# Altium PCB PCB1.PcbDoc (part 2 of 2)
Units mm, origin at the board's own origin, x right, y up, seen from the top; angles counter-clockwise.
Board outline 138.94 x 170 mm, 2 copper layers (Top Layer, Bottom Layer); 258 components, 165 nets, 778 pads, 42 vias.
Unrouted connection lines stored in the file: 312.
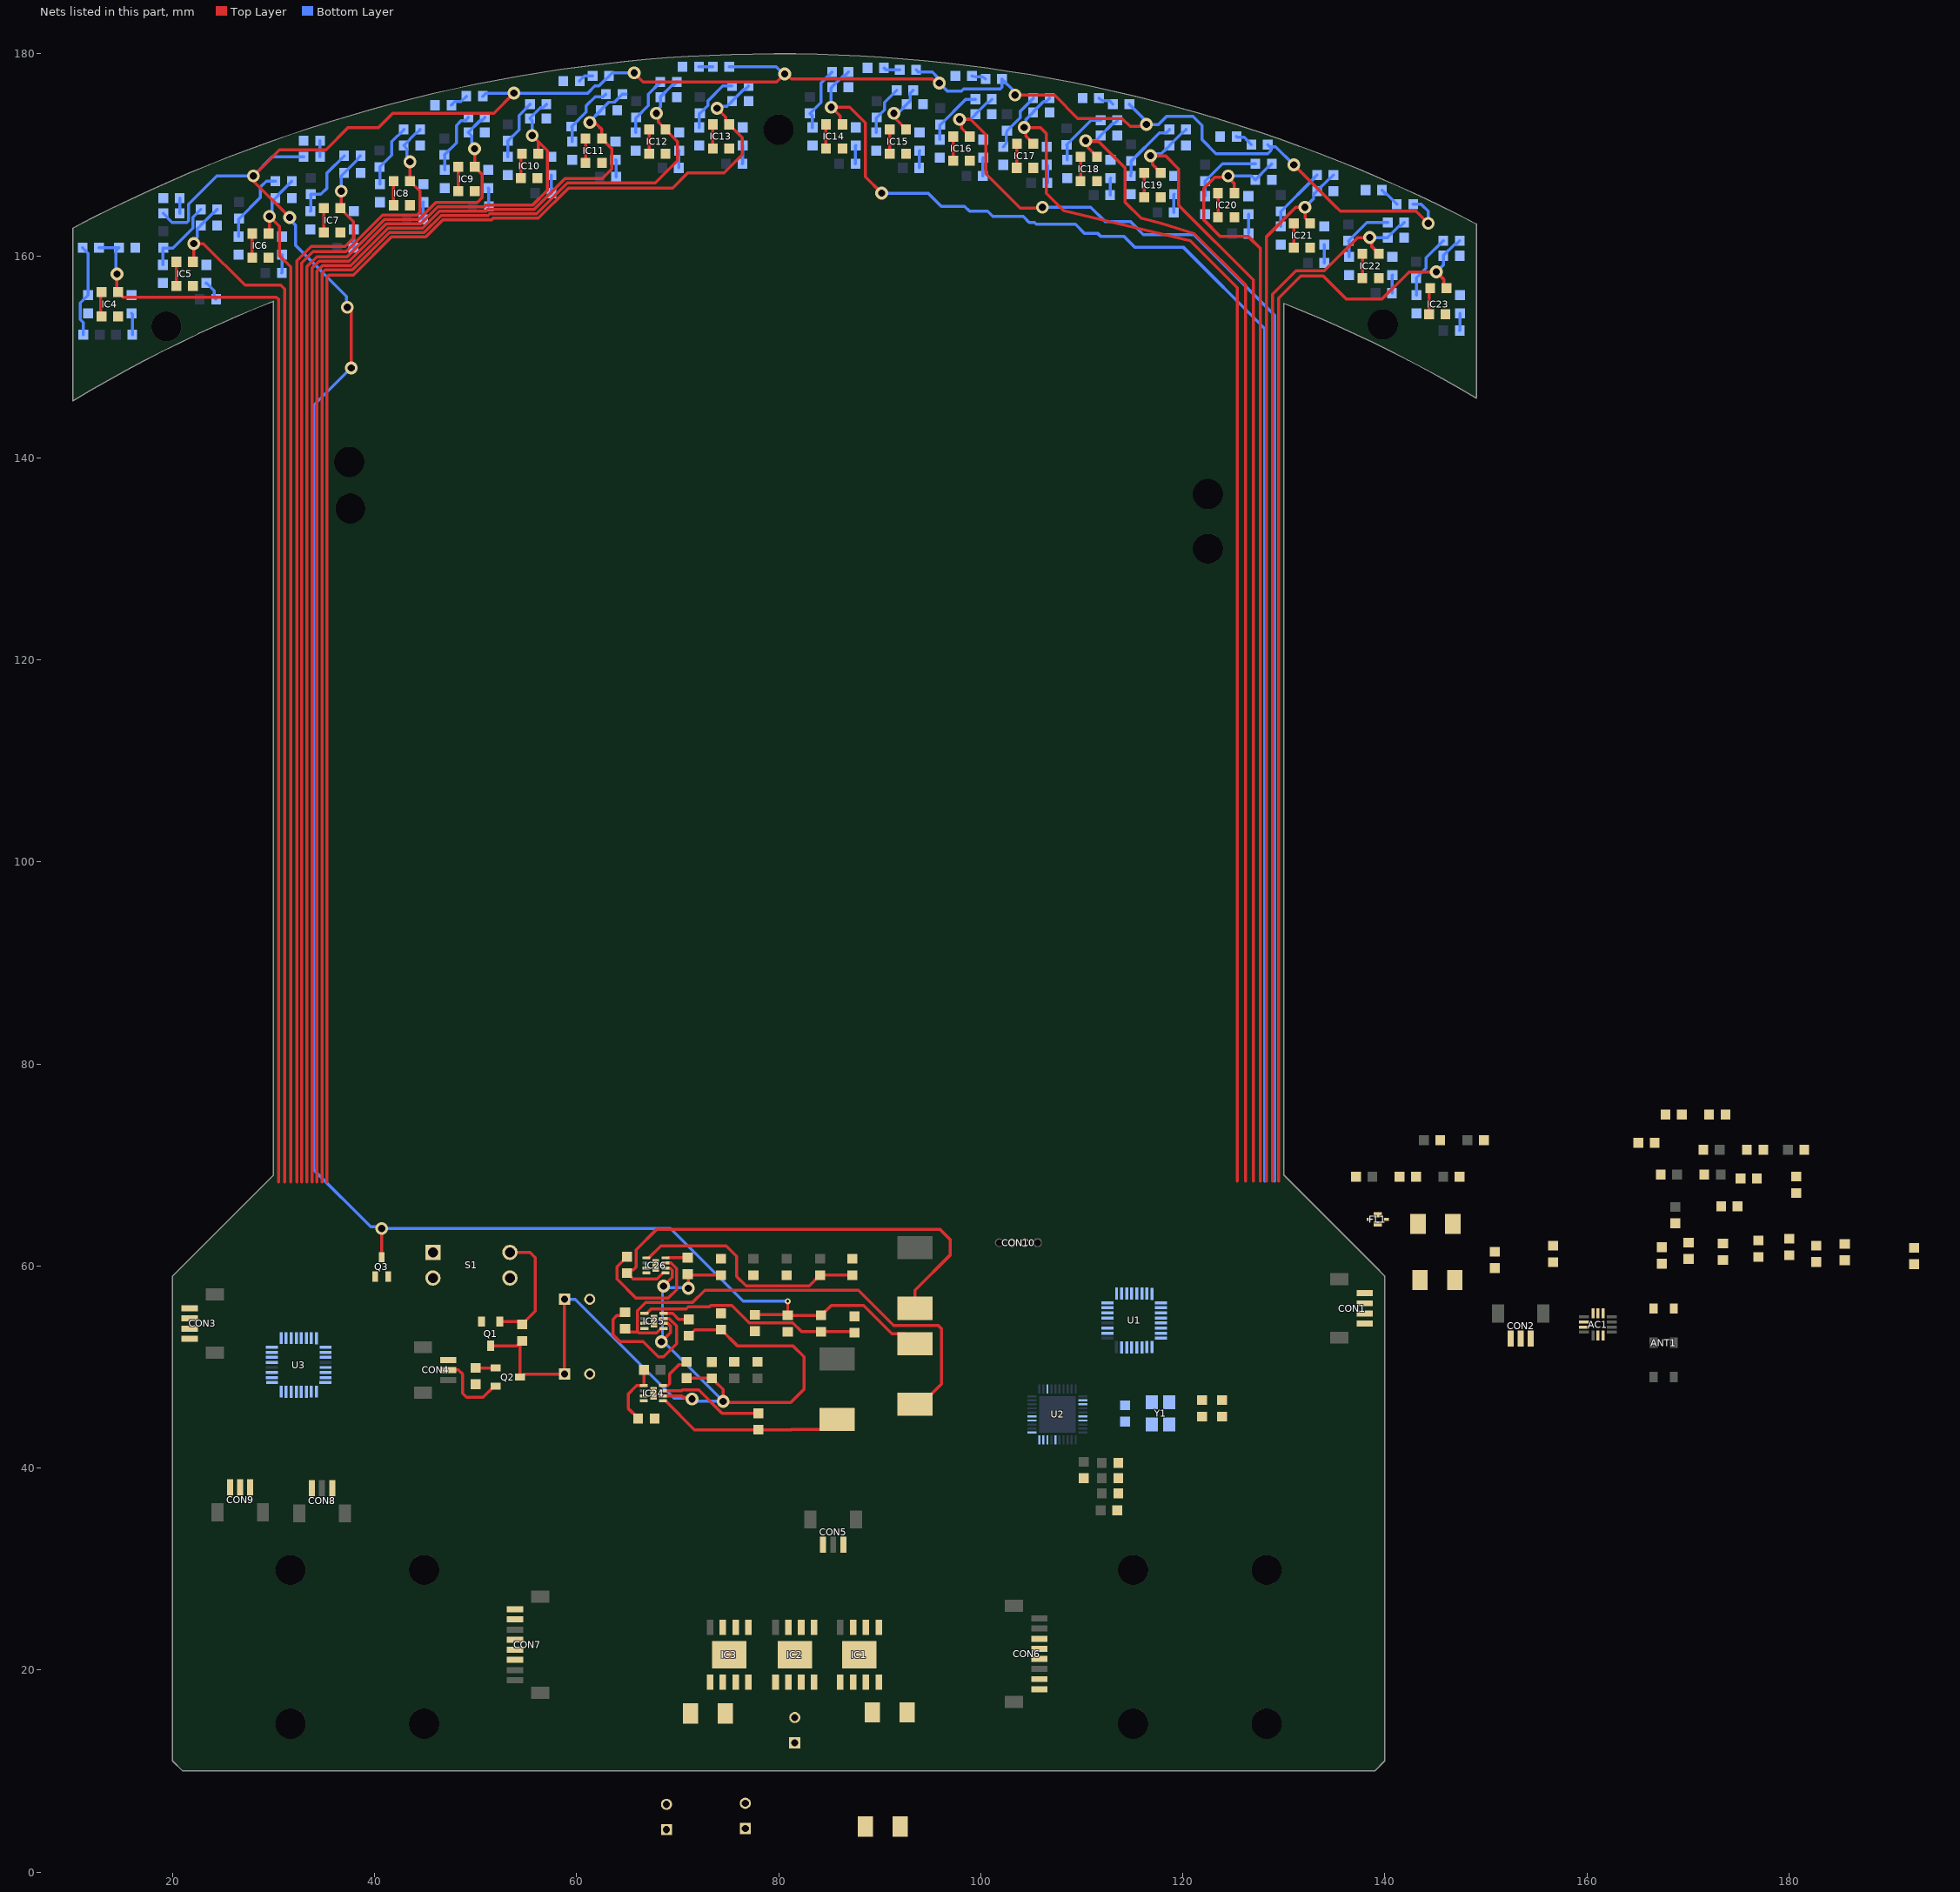
[diagram p2: the nets of this part, all layers, seen from the top]

## Via types
v1: diameter 1.27, hole 0.711, Top Layer to Bottom Layer, tented both sides, 41 vias
v2: diameter 0.6, hole 0.3, Top Layer to Bottom Layer, tented both sides, 1 vias

## Nets (pads, with @x,y where several pads share a name; then routed paths per layer and width w, separated by ;. In a path a pad name is that pad's centre, name@x,y a point inside that pad or via, vN(x,y) a via of type N, cw(c..) or ccw(c..) an arc to the next point about the centre after c; other vN are vias at no path point) (continued)
5V: C15.2 C16.2 CON9.2 L4.2 Q3.3 R14.1 R84.1 R87.1 R90.1 R93.1 R98.1 R101.1 R104.1 R107.1 R110.1 R111.1 | length 344.2
  Top Layer w0.3: v1(31.6,163.8) 28,167.4 v1(28,167.9) 30.6,170.5 35.2,170.5 37.4,172.7 40.4,172.7 41.8,174.1 51.8,174.1 v1(53.8,176.1) ; v1(37.3,154.9) 37.7,154.5 v1(37.7,148.9) ; Q3.3@40.7,60.85 v1(40.7,63.7) ; v1(65.7,178.1) 66.6,177.2 79.8,177.2 v1(80.6,178) 80.761,178 81.261,177.5 95.239,177.5 95.639,177.1 v1(95.9,177.1) ; C15.2@77.637,55.165 C16.2@80.848,55.165 ; v2(80.9,56.5) C16.2@80.9,55.113 84.217,55.113 85.205,56.1 88.4,56.1 91.2,53.3 92.5,53.3 L4.2@93.5,52.3 ; v1(103.4,175.9) 107.3,175.9 109.6,173.6 114,173.6 114.8,172.8 116.2,172.8 v1(116.4,173) ; v1(131,169) 135,165 135.6,164.4 140,164.4 143.1,164.4 v1(144.3,163.2)
  Bottom Layer w0.3: R104.1@19.087,164.183 19.97,163.3 21.424,163.3 21.6,163.476 21.6,165.1 24.4,167.9 v1(28,167.9) 29.883,169.783 32.987,169.783 R101.1@32.987,169.8 ; v1(31.6,163.8) 31.6,163.6 32.2,163 32.2,161 37.215,155.985 37.215,154.985 v1(37.3,154.9) ; v1(37.7,148.9) 34,145.2 34,69.9 34,69.5 39.615,63.885 40.515,63.885 v1(40.7,63.7) 69.3,63.7 76.5,56.5 v2(80.9,56.5) ; R98.1@50.713,175.783 51.03,176.1 v1(53.8,176.1) 61.1,176.1 61.8,176.8 62.213,176.8 62.863,177.45 62.88,177.45 63.213,177.783 R107.1@63.213,177.8 63.513,178.1 v1(65.7,178.1) ; R93.1@75.113,178.7 79.766,178.7 80.466,178 v1(80.6,178) ; R111.1@93.613,178.4 93.813,178.2 95.2,178.2 v1@95.714,177.686 ; v1(95.9,177.1) 96.7,176.3 98.1,176.3 98.3,176.5 101.937,176.5 102.113,176.676 R110.1@102.113,177.483 ; R110.1@102.113,177.5 R110.1@102.113,177.483 ; v1@103.3,176.295 R110.1@102.113,177.483 ; R90.1@114.713,175 114.713,174.983 v1@116.214,173.481 ; v1(116.4,173) 117.6,173 118.4,173.8 121,173.8 121.9,172.9 121.9,171.5 123.3,170.1 128.4,170.1 128.7,170.4 128.7,170.713 R87.1@128.61,170.803 ; R87.1@128.413,171 R87.1@128.61,170.803 ; v1(131,169) 129.197,170.803 R87.1@128.61,170.803 ; R84.1@142.813,165.1 142.813,165.083 143.617,165.083 144.3,164.4 v1(144.3,163.2)
11.1V: C10.2 C14.2 C18.2 C21.1 C21.2 C22.1 C22.2 C23.1 C23.2 C50.1 C50.2 C51.1 C51.2 C52.1 C52.2 C53.1 C54.1 IC1.5 IC2.5 IC3.5 IC24.2 IC25.2 IC26.2 Q1.3 Q2.3 R1.2 R8.2 R11.2 R12.2 R16.2 | length 97.3
  Top Layer w0.3: Q1.3@51.5,52.1 54.095,52.1 54.583,52.587 R11.2@54.6,52.587 54.4,52.387 Q2.3@54.4,49 54.55,49 54.85,49.3 C53.1@58.8,49.3 C54.1@58.8,56.7 ; v1(68.4,52.5) 69.277,53.377 69.277,54.065 69.042,54.3 IC25.2@68.6,54.3 ; IC24.2@68.55,47.15 70.388,47.15 70.532,47.005 71.234,47.005 v1(71.42,46.82) ; v1(68.6,58) 69.477,58.877 69.477,59.565 69.242,59.8 IC26.2@68.8,59.8 ; R8.2@70.9,48.887 73.374,48.887 C10.2@73.4,48.862 73.417,48.862 73.75,48.529 73.75,48.512 74.5,47.762 v1(74.5,46.6) 74.6,46.5 81.2,46.5 82.5,47.8 82.5,51 81.4,52.1 75.905,52.1 74.317,53.687 C14.2@74.3,53.687 71.717,53.687 71.117,53.087 R12.2@71.1,53.087 ; R16.2@71,59.187 R16.2@71.1,59.087 ; v1(71.052,57.779) 71.052,59.039 R16.2@71.1,59.087 ; C18.2@74.3,59.087 R16.2@71.1,59.087
  Bottom Layer w0.3: C54.1@58.8,56.7 59.854,56.7 69.654,46.9 70.638,46.9 ; v1(68.4,52.5) 68.5,52.6 68.5,57.9 v1(68.6,58) 68.75,57.85 70.981,57.85 v1(71.052,57.779) ; v1@68.6,52.5 v1(74.5,46.6) 71.902,46.6 71.682,46.82 v1(71.42,46.82)
ADC1: C24.1 R32.1 R82.1 U3.7 | length 110
  Top Layer w0.3: R82.1@14.5,156.513 v1(14.5,158.2) ; R82.1@14.513,156.6 14.513,156.583 R82.1@14.654,156.441 ; R82.1@14.613,156.4 14.613,156.383 15.095,155.9 30.3,155.9 30.5,155.7 30.5,68.3
  Bottom Layer w0.3: R32.1@12.726,160.8 C24.1@14.7,160.8 14.4,160.5 v1@14.4,158.4
ADC2: C25.1 R28.1 R85.1 U3.8 | length 105.4
  Top Layer w0.3: R85.1@22.013,159.4 22.1,159.487 v1(22.1,161.2) 23.064,161.2 27.182,157.082 30.728,157.082 31.1,156.71 31.1,68.3
  Bottom Layer w0.3: v1(22.1,161.2) 22.1,161.462 22.455,161.817 22.455,162.667 C25.1@22.7,162.913 ; C25.1@22.787,163 22.787,163.017 24.02,164.25 24.08,164.25 24.413,164.583 R28.1@24.413,164.6
ADC3: C26.1 R29.1 R88.1 U3.9 | length 102.6
  Top Layer w0.3: R88.1@29.513,162.2 29.6,162.287 v1(29.6,163.9) 30.6,162.9 30.6,160 31.7,158.9 31.7,68.3
  Bottom Layer w0.3: v1(29.6,163.9) 29.6,164.162 29.855,164.417 29.855,165.367 C26.1@30.187,165.7 30.52,166.033 30.52,166.09 31.813,167.383 R29.1@31.813,167.4
ADC4: C27.1 R30.1 R91.1 U3.10 | length 107.3
  Top Layer w0.3: 32.3,68.3 32.3,159.5 33.727,160.927 37.104,160.927 37.9,161.723 37.9,163.395 36.613,164.683 R91.1@36.613,164.7 36.7,164.787 v1(36.7,166.4)
  Bottom Layer w0.3: v1(36.7,166.4) 36.7,167.913 C27.1@36.987,168.2 36.987,168.217 38.28,169.51 38.28,169.567 R30.1@38.613,169.9
ADC5: C28.1 R35.1 R94.1 U3.11 | length 114.3
  Top Layer w0.3: 32.8,68.3 32.8,159.3 33.9,160.4 37.181,160.4 40.808,164.027 44.212,164.027 44.5,164.315 44.5,166.395 43.513,167.383 R94.1@43.513,167.4 43.5,167.413 v1(43.5,169.3)
  Bottom Layer w0.3: v1(43.5,169.3) 43.5,169.562 43.22,169.843 43.22,170.567 C28.1@42.887,170.9 42.887,170.917 44.12,172.15 44.18,172.15 44.513,172.483 R35.1@44.513,172.5
ADC6: C29.1 R41.1 R96.1 U3.12 | length 120.1
  Top Layer w0.3: 33.3,68.3 33.3,158.924 34.276,159.9 37.285,159.9 40.985,163.6 44.388,163.6 46.069,165.281 50.168,165.281 50.672,165.785 50.672,168.023 49.913,168.783 R96.1@49.913,168.8 49.9,168.813 v1(49.9,170.6)
  Bottom Layer w0.3: v1(49.9,170.6) 49.9,170.862 49.62,171.143 49.62,171.867 C29.1@49.287,172.2 49.287,172.217 50.42,173.35 50.58,173.35 50.913,173.683 R41.1@50.913,173.7
ADC7: C30.1 R42.1 R99.1 U3.13 | length 128.2
  Top Layer w0.3: 33.8,68.3 33.8,158.773 34.5,159.473 37.461,159.473 41.161,163.173 44.565,163.173 46.246,164.854 50.862,164.854 51.009,165 55.625,165 57.1,166.476 57.1,170.4 56.213,171.287 ; v1(55.6,171.9) 56.213,171.287 ; R99.1@56.213,170.1 56.213,171.287
  Bottom Layer w0.3: v1(55.6,171.9) 55.6,173.387 C30.1@55.387,173.6 55.387,173.617 56.42,174.65 56.68,174.65 57.013,174.983 R42.1@57.013,175
ADC8: C31.1 R43.1 R102.1 U3.14 | length 134.2
  Top Layer w0.3: 34.3,68.3 34.3,158.47 34.876,159.046 37.638,159.046 41.338,162.746 44.742,162.746 46.423,164.427 51.039,164.427 51.185,164.573 55.801,164.573 58.855,167.627 62.527,167.627 63.5,168.6 63.5,170.595 62.513,171.583 R102.1@62.513,171.6 62.513,172.487 61.986,173.014 61.486,173.014 v1(61.3,173.2)
  Bottom Layer w0.3: v1(61.3,173.2) 61.3,173.295 62.387,174.383 C31.1@62.387,174.4 62.387,174.417 63.17,175.2 63.743,175.2 64.526,175.983 R43.1@64.526,176 R43.1@64.913,176
ADC9: C32.1 R44.1 R105.1 U3.15 | length 139.4
  Top Layer w0.3: 34.8,68.3 34.8,158.3 35.1,158.6 37.796,158.6 41.496,162.3 44.9,162.3 46.6,164 51.25,164 51.396,164.146 56.046,164.146 59.1,167.2 67.8,167.2 70,169.4 70,171.295 68.813,172.483 R105.1@68.813,172.5 68.813,172.517 68.086,173.245 68.086,173.914 v1(67.9,174.1)
  Bottom Layer w0.3: v1(67.9,174.1) 67.9,174.362 68.287,174.75 C32.1@68.287,175.7 68.287,175.717 69.42,176.85 69.58,176.85 69.913,177.183 R44.1@69.913,177.2
ADC10: C33.1 R53.1 R108.1 U3.16 | length 145.4
  Top Layer w0.3: 35.3,68.3 35.3,157.924 35.476,158.1 37.9,158.1 41.673,161.873 45.077,161.873 46.777,163.573 51.6,163.573 51.746,163.719 56.223,163.719 59.204,166.7 69.5,166.7 71,168.2 74.6,168.2 76.4,170 76.4,171.695 75.113,172.983 R108.1@75.113,173 74.78,173.333 74.78,173.72 v1(73.9,174.6)
  Bottom Layer w0.3: v1(73.9,174.6) 74.086,174.786 74.873,174.786 75.037,174.95 75.055,174.95 75.387,175.283 C33.1@75.387,175.3 75.387,175.317 76.52,176.45 76.68,176.45 77.013,176.783 R53.1@77.013,176.8
ADC11: C34.1 R54.1 R83.1 U3.17 | length 146
  Top Layer w0.3: R83.1@86.313,173 86.072,173.241 86.072,173.828 v1(85.2,174.7) 87.042,174.7 88.6,173.142 88.6,167.8 v1(90.2,166.2)
  Bottom Layer w0.3: v1(85.2,174.7) 85.2,176.613 C34.1@85.287,176.7 85.287,176.717 86.42,177.85 86.58,177.85 86.913,178.183 R54.1@86.913,178.2 ; v1(90.2,166.2) 94.8,166.2 96.1,164.9 98.4,164.9 98.9,164.4 100.7,164.4 101.2,163.9 104.2,163.9 104.8,163.3 105.346,163.3 105.518,163.129 109.371,163.129 110.3,162.2 111.6,162.2 111.9,161.9 114.2,161.9 115.242,160.858 120.042,160.858 128.1,152.8 128.1,68.4
ADC12: C35.1 R55.1 R86.1 U1.7 | length 4.8
  Top Layer w0.3: v1@91.586,173.545 92.613,172.517 R86.1@92.613,172.5
  Bottom Layer w0.3: v1(91.4,174.1) 91.586,174.286 91.977,174.286 92.674,174.983 C35.1@92.674,175 93.007,175.333 93.007,176.094 R55.1@93.313,176.4
ADC13: C36.1 R56.1 R89.1 U1.8 | length 133.5
  Top Layer w0.3: R89.1@98.913,171.8 98.913,171.817 98.086,172.645 98.086,173.314 v1(97.9,173.5) 99,173.5 100.5,172 100.5,168.124 103.924,164.7 106,164.7 v1(106.1,164.8)
  Bottom Layer w0.3: v1(97.9,173.5) 98.992,173.5 99.474,173.983 C36.1@99.474,174 99.474,174.017 100.607,175.15 100.767,175.15 101.1,175.483 R56.1@101.1,175.5 ; v1(106.1,164.8) 110.9,164.8 112.3,163.4 114.8,163.4 116.1,162.1 121.1,162.1 129.1,154.1 129.1,68.4
ADC14: C37.1 R65.1 R92.1 U1.9 | length 124.8
  Top Layer w0.3: R92.1@105.213,171.1 105.213,171.117 104.486,171.845 104.486,172.514 v1(104.3,172.7) 105.9,172.7 106.5,172.1 106.5,166.194 108.181,164.512 108.242,164.452 120.737,161.493 125.4,156.83 125.4,68.4
  Bottom Layer w0.3: v1(104.3,172.7) 104.486,172.886 104.486,173.481 105.187,174.183 C37.1@105.187,174.2 105.187,174.217 106.22,175.25 106.48,175.25 106.813,175.583 R65.1@106.813,175.6
ADC15: C38.1 R66.1 R95.1 U1.10 | length 117.9
  Top Layer w0.3: v1(110.4,171.4) v1@110.517,171.283 ; R95.1@111.513,169.8 111.513,169.817 110.586,170.745 110.586,171.214 v1@110.517,171.283 ; 126.2,68.4 126.2,157.12 121.181,162.14 121.128,162.192 117.879,163.199 115.875,163.725 114.3,165.3 114.3,168.7 111.717,171.283 v1@110.517,171.283
  Bottom Layer w0.3: v1(110.4,171.4) 111.405,171.4 111.887,171.883 C38.1@111.887,171.9 111.887,171.917 113.02,173.05 113.18,173.05 113.513,173.383 R66.1@113.513,173.4
ADC16: C39.1 R67.1 R97.1 U1.11 | length 113.3
  Top Layer w0.3: R97.1@117.813,168.2 117.813,168.217 116.986,169.045 116.986,169.714 v1(116.8,169.9) 118.3,169.9 119.6,168.6 119.6,165 127,157.6 127,68.4
  Bottom Layer w0.3: v1(116.8,169.9) 116.986,170.086 117.873,170.086 118.337,170.55 118.355,170.55 118.687,170.883 C39.1@118.687,170.9 118.687,170.917 119.92,172.15 119.98,172.15 120.313,172.483 R67.1@120.313,172.5
ADC17: C40.1 R68.1 R100.1 U1.12 | length 112.2
  Top Layer w0.3: R100.1@125.113,166.2 125.113,167.15 124.5,167.763 v1(124.5,167.9) 124.376,167.776 123.176,167.776 122.1,166.7 122.1,163.531 123.731,161.9 126.5,161.9 127.7,160.7 127.7,150.326 127.7,150.265 127.7,68.4
  Bottom Layer w0.3: v1(124.5,167.9) 126.787,167.9 126.837,167.85 126.855,167.85 C40.1@127.187,167.517 ; C40.1@127.187,167.5 C40.1@127.187,167.517 ; R68.1@128.813,169.1 128.813,169.083 128.48,168.75 128.42,168.75 C40.1@127.187,167.517
ADC18: C41.1 R76.1 R103.1 U1.13 | length 104.7
  Top Layer w0.3: 128.3,68.4 128.3,161.9 131.191,164.791 132.091,164.791 v1(132.1,164.8) 132.1,163.726 132.276,163.55 132.28,163.55 132.613,163.217 R103.1@132.613,163.2
  Bottom Layer w0.3: v1(132.1,164.8) 132.955,165.655 132.955,166.067 C41.1@133.287,166.4 133.287,166.417 134.52,167.65 134.58,167.65 134.913,167.983 R76.1@134.913,168
ADC19: C42.1 R77.1 R106.1 U1.14 | length 105.8
  Top Layer w0.3: 128.9,68.4 128.9,156.2 131.2,158.5 134,158.5 137.3,161.8 v1(138.5,161.8) 138.686,161.614 138.686,160.945 139.413,160.217 R106.1@139.413,160.2
  Bottom Layer w0.3: v1(138.5,161.8) C42.1@140.287,161.8 140.287,161.817 141.42,162.95 141.58,162.95 141.913,163.283 R77.1@141.913,163.3
ADC20: C43.1 R78.1 R109.1 U1.15 | length 112.2
  Top Layer w0.3: 129.5,68.4 129.5,155.8 131.7,158 133.9,158 136.2,155.7 139.7,155.7 142.4,158.4 v1(145.1,158.4) 145.867,157.633 145.867,157.046 R109.1@146.113,156.8
  Bottom Layer w0.3: v1(145.1,158.4) 145.787,159.087 C43.1@145.787,160 145.787,160.017 146.92,161.15 147.08,161.15 147.413,161.483 R78.1@147.413,161.5
Anetenna: FL1.3 U2.2
"Enkoder L1": CON6.4 U1.22
"Enkoder L2": CON6.5 U1.23
"Enkoder P1": CON7.4 U1.2
"Enkoder P2": CON7.5 U1.3
GND: AC1.6 AC1.7 ANT1.4 ANT1.5 C1.1 C2.1 C3.1 C4.1 C5.1 C6.1 C7.1 C8.1 C10.1 C11.1 C12.1 C14.1 C15.1 C16.1 C18.1 C19.1 C20.1 C24.2 C25.2 C26.2 C27.2 C28.2 C29.2 C30.2 C31.2 C32.2 C33.2 C34.2 C35.2 C36.2 C37.2 C38.2 C39.2 C40.2 C41.2 C42.2 C43.2 C44.1 C45.1 C46.1 C47.1 C48.1 C49.1 C53.2 C54.2 C55.2 CON1.3 CON3.3 CON4.3 CON6.6 CON7.6 CON8.3 CON9.3 CON10.3 D1.2 D2.2 D3.2 D4.2 D5.2 D6.2 D7.2 D8.2 D9.2 D10.2 D11.2 D12.2 D13.2 D14.2 D15.2 D16.2 D17.2 D18.2 D19.2 D20.2 D21.2 D22.2 D23.2 D24.2 D25.2 D26.2 D27.2 D28.2 D29.2 D30.2 D31.2 D32.2 D33.2 D34.2 D35.2 FL1.2 FL1.4 IC1.1 IC1.9 IC2.1 IC2.9 IC3.1 IC3.9 IC4.2 IC4.4 IC5.2 IC5.4 IC6.2 IC6.4 IC7.2 IC7.4 IC8.2 IC8.4 IC9.2 IC9.4 IC10.2 IC10.4 IC11.2 IC11.4 IC12.2 IC12.4 IC13.2 IC13.4 IC14.2 IC14.4 IC15.2 IC15.4 IC16.2 IC16.4 IC17.2 IC17.4 IC18.2 IC18.4 IC19.2 IC19.4 IC20.2 IC20.4 IC21.2 IC21.4 IC22.2 IC22.4 IC23.2 IC23.4 IC24.7 IC24.8 IC24.9 IC25.7 IC25.8 IC25.9 IC26.7 IC26.8 IC26.9 L1.1 L1.2 L2.1 Q1.2 Q3.2 R2.1 R10.2 R13.1 R15.2 R18.2 R19.1 R20.1 R21.1 S1.A2 S1.B2 U1.5 U2.3 U2.16 U2.20 U2.25 U3.5 Y1.2 Y1.4 | length 0
  Top Layer w0.3: C10.1@73.4,50.487 C10.1@73.413,50.5
HFXT_M: C4.2 U2.7 Y1.3
HFXT_P: R4.2 U2.6
LED1: R112.1 U3.23
LED2: R113.1 U3.2
LED3: R114.1 U3.3
LED4: R115.1 U1.21
LED5: R116.1 U1.20
"LED CONTROL": Q3.1 U1.19
MSCL: AC1.3 R5.2 U3.32
MSDA: AC1.2 R6.2 U3.1
NetAC1_12: AC1.12 CON2.1
NetAC1_13: AC1.13 CON2.3
NetAC1_14: AC1.14 CON2.2
NetC3_2: C3.2 R4.1 Y1.1
NetC9_1: C9.1 IC24.3 | length 10.4
  Top Layer w0.3: IC24.3@68.55,47.65 70.398,47.65 70.48,47.732 72.078,47.732 74.397,45.413 C9.1@78,45.413
NetC9_2: C9.2 IC24.1 L3.1 | length 18.9
  Top Layer w0.3: IC24.1@68.55,46.65 68.8,46.65 71.663,43.787 C9.2@78,43.787 81.269,43.787 81.281,43.8 84.8,43.8 L3.1@85.8,44.8
NetC13_1: C13.1 IC25.3 | length 14.1
  Top Layer w0.3: C13.1@64.8,55.413 64.467,55.08 63.98,55.08 63.6,54.7 63.6,53.176 64.276,52.5 66.6,52.5 68.1,51 68.6,51 69.9,52.3 69.9,54.046 69.146,54.8 IC25.3@68.6,54.8
NetC13_2: C13.2 IC25.1 L4.1 | length 47.6
  Top Layer w0.3: C13.2@64.8,53.787 65.133,53.455 66.061,53.455 66.143,53.373 67.923,53.373 68.35,53.8 IC25.1@68.6,53.8 ; 66.023,53.535 66.023,55.565 66.831,56.373 71.473,56.373 72.7,57.6 87.9,57.6 91.4,54.1 95.8,54.1 96.1,53.8 96.1,48.3 94.1,46.3 L4.1@93.5,46.3
NetC17_1: C17.1 IC26.3 | length 13.1
  Top Layer w0.3: C17.1@65,60.913 64.983,60.913 64,59.93 64,58.7 65.9,56.8 69.054,56.8 69.904,57.65 69.904,59.742 69.346,60.3 IC26.3@68.8,60.3
NetC17_2: C17.2 IC26.1 L5.1 | length 47.7
  Top Layer w0.3: IC26.1@68.8,59.3 68.55,59.3 67.95,58.7 65.605,58.7 65.017,59.287 C17.2@65,59.287 65.333,59.62 65.62,59.62 65.9,59.9 65.9,61.6 67.9,63.6 96,63.6 97,62.6 97,61.1 93.5,57.6 L5.1@93.5,55.8
NetC55_1: C55.1 FL1.1 L2.2
NetCON4_2: CON4.2 Q2.2 | length 7.4
  Top Layer w0.3: CON4.2@47.3,49.7 48.3,49.7 48.7,49.3 48.7,47.4 49.1,47 50.75,47 51.85,48.1 Q2.2@52,48.1
NetCON5_1: CON5.1 IC2.8
NetCON5_3: CON5.3 IC2.6
NetCON6_1: CON6.1 IC1.8
NetCON6_2: CON6.2 IC1.6
NetCON7_1: CON7.1 IC3.8
NetCON7_2: CON7.2 IC3.6
NetD1_1: D1.1 R82.2 | length 2.2
  Top Layer w0.3: D1.1@12.774,154.4 12.887,154.513 R82.2@12.887,156.6
NetD2_1: D2.1 R83.2 | length 2.4
  Top Layer w0.3: D2.1@84.687,170.6 R83.2@84.687,173
NetD3_1: D3.1 R84.2 | length 2.1
  Bottom Layer w0.3: D3.1@139.726,166.5 139.726,166.483 140.058,166.15 140.155,166.15 141.187,165.117 R84.2@141.187,165.1
NetD4_1: D4.1 R85.2 | length 2.4
  Top Layer w0.3: D4.1@20.387,157 R85.2@20.387,159.4
NetD5_1: D5.1 R86.2 | length 2.4
  Top Layer w0.3: D5.1@90.987,170.1 R86.2@90.987,172.5
NetD6_1: D6.1 R87.2 | length 1.8
  Bottom Layer w0.3: D6.1@125.326,171.8 125.403,171.722 126.082,171.722 126.455,171.35 126.787,171.017 R87.2@126.787,171
NetD7_1: D7.1 R88.2 | length 2.4
  Top Layer w0.3: D7.1@27.887,159.8 R88.2@27.887,162.2
NetD8_1: D8.1 R89.2 | length 2.4
  Top Layer w0.3: D8.1@97.287,169.4 R89.2@97.287,171.8
NetD9_1: D9.1 R90.2 | length 1.6
  Bottom Layer w0.3: D9.1@111.713,175.6 112.045,175.35 112.755,175.35 R90.2@113.087,175
NetD10_1: D10.1 R91.2 | length 2.4
  Top Layer w0.3: D10.1@34.987,162.3 R91.2@34.987,164.7
NetD11_1: D11.1 R92.2 | length 2.4
  Top Layer w0.3: D11.1@103.574,168.7 103.574,171.087 R92.2@103.587,171.1
NetD12_1: D12.1 R93.2 | length 1.4
  Bottom Layer w0.3: D12.1@72.113,178.7 R93.2@73.487,178.7
NetD13_1: D13.1 R94.2 | length 2.4
  Top Layer w0.3: D13.1@41.887,165 R94.2@41.887,167.4
NetD14_1: D14.1 R95.2 | length 2.4
  Top Layer w0.3: D14.1@109.887,167.4 R95.2@109.887,169.8
NetD15_1: D15.1 R96.2 | length 2.4
  Top Layer w0.3: D15.1@48.287,166.4 R96.2@48.287,168.8
NetD16_1: D16.1 R97.2 | length 2.4
  Top Layer w0.3: D16.1@116.187,165.8 R97.2@116.187,168.2
NetD17_1: D17.1 R98.2 | length 1.9
  Bottom Layer w0.3: D17.1@47.613,174.9 47.613,174.917 47.945,175.25 48.555,175.25 49.087,175.783 R98.2@49.087,175.8
NetD18_1: D18.1 R99.2 | length 2.4
  Top Layer w0.3: D18.1@54.487,167.7 54.487,170 R99.2@54.587,170.1
NetD19_1: D19.1 R100.2 | length 2.4
  Top Layer w0.3: D19.1@123.487,163.8 R100.2@123.487,166.2
NetD20_1: D20.1 R101.2 | length 1.6
  Bottom Layer w0.3: R101.2@34.613,169.8 D20.1@34.613,171.4
NetD21_1: D21.1 R102.2 | length 2.4
  Top Layer w0.3: D21.1@60.887,169.2 R102.2@60.887,171.6
NetD22_1: D22.1 R103.2 | length 2.4
  Top Layer w0.3: D22.1@130.987,160.8 R103.2@130.987,163.2
NetD23_1: D23.1 R104.2 | length 1.5
  Bottom Layer w0.3: R104.2@20.713,164.2 D23.1@20.713,165.7
NetD24_1: D24.1 R105.2 | length 2.4
  Top Layer w0.3: D24.1@67.187,170.1 R105.2@67.187,172.5
NetD25_1: D25.1 R106.2 | length 2.4
  Top Layer w0.3: D25.1@137.787,157.8 R106.2@137.787,160.2
NetD26_1: D26.1 R107.2 | length 1.5
  Bottom Layer w0.3: D26.1@60.313,177.3 60.313,177.317 60.795,177.8 R107.2@61.587,177.8
NetD27_1: D27.1 R108.2 | length 2.4
  Top Layer w0.3: D27.1@73.487,170.6 R108.2@73.487,173
NetD28_1: D28.1 R109.2 | length 2.6
  Top Layer w0.3: D28.1@144.387,154.2 144.387,156.7 R109.2@144.487,156.8
NetD29_1: D29.1 R110.2 | length 1.4
  Bottom Layer w0.3: D29.1@99.126,177.8 99.458,177.727 100.155,177.727 R110.2@100.487,177.5
NetD30_1: D30.1 R111.2 | length 1.6
  Bottom Layer w0.3: D30.1@90.426,178.6 90.626,178.4 R111.2@91.987,178.4
NetD31_1: D31.1 R112.2
NetD32_1: D32.1 R113.2
NetD33_1: D33.1 R114.2
NetD34_1: D34.1 R115.2
NetD35_1: D35.1 R116.2
NetIC1_7: IC1.7 R19.2
NetIC2_7: IC2.7 R20.2
NetIC3_7: IC3.7 R21.2
NetIC4_1: IC4.1 R27.2 | length 2.1
  Bottom Layer w0.3: IC4.1@15.95,154.3 16.026,154.224 R27.2@16.026,152.2
NetIC4_3: IC4.3 R22.2 R32.2 | length 9.3
  Bottom Layer w0.3: R32.2@11.1,160.8 11.1,160.783 11.65,160.233 IC4.3@11.65,156.1 10.873,155.323 10.873,153.685 11.174,153.384 R22.2@11.174,152.2
NetIC5_1: IC5.1 R31.2 | length 2.1
  Bottom Layer w0.3: IC5.1@23.313,157.263 IC5.1@23.35,157.3 24.124,156.526 24.124,155.889 R31.2@24.313,155.7
NetIC5_3: IC5.3 R23.2 R28.2 | length 7.6
  Bottom Layer w0.3: IC5.3@19.05,159.1 19.05,160.75 20.05,160.75 22.028,162.728 22.028,163.823 22.787,164.583 R28.2@22.787,164.6
NetIC6_1: IC6.1 R33.2 | length 1.8
  Bottom Layer w0.3: R33.2@30.813,158.3 30.85,158.337 IC6.1@30.85,160.1
NetIC6_3: IC6.3 R24.2 R29.2 | length 7.5
  Bottom Layer w0.3: IC6.3@26.55,161.9 26.55,163.637 R24.2@26.6,163.687 26.617,163.687 28.7,165.77 28.7,166.8 29.3,167.4 R29.2@30.187,167.4
NetIC7_1: IC7.1 R34.2 | length 1.8
  Bottom Layer w0.3: R34.2@37.913,160.8 37.95,160.837 IC7.1@37.95,162.6
NetIC7_3: IC7.3 R25.2 R30.2 | length 7.5
  Bottom Layer w0.3: IC7.3@33.65,164.4 33.7,164.45 R25.2@33.7,166.087 34.687,166.087 35.3,166.7 35.3,168.195 36.987,169.883 R30.2@36.987,169.9
NetIC8_1: IC8.1 R36.2 | length 1.7
  Bottom Layer w0.3: R36.2@44.813,163.6 44.813,165.263 IC8.1@44.85,165.3
NetIC8_3: IC8.3 R26.2 R35.2 | length 6.4
  Bottom Layer w0.3: IC8.3@40.55,167.1 40.55,168.82 41.702,169.972 41.702,171.298 42.887,172.483 R35.2@42.887,172.5
NetIC9_1: IC9.1 R45.2 | length 1.8
  Bottom Layer w0.3: IC9.1@51.25,166.7 51.313,166.637 R45.2@51.313,164.9
NetIC9_3: IC9.3 R37.2 R41.2 | length 6.5
  Bottom Layer w0.3: IC9.3@46.95,168.5 46.95,169.937 R37.2@46.9,169.987 46.917,169.987 48.1,171.17 48.1,172.9 48.55,173.35 48.955,173.35 49.287,173.683 R41.2@49.287,173.7
NetIC10_1: IC10.1 R46.2 | length 1.8
  Bottom Layer w0.3: IC10.1@57.5,168 57.513,167.987 R46.2@57.513,166.2
NetIC10_3: IC10.3 R38.2 R42.2 | length 6.1
  Bottom Layer w0.3: IC10.3@53.2,169.8 R38.2@53.2,171.387 53.217,171.387 54.302,172.472 54.302,173.898 55.387,174.983 R42.2@55.387,175
NetIC11_1: IC11.1 R47.2 | length 1.7
  Bottom Layer w0.3: IC11.1@63.85,169.5 63.913,169.437 R47.2@63.913,167.8
NetIC11_3: IC11.3 R39.2 R43.2 | length 6.6
  Bottom Layer w0.3: R39.2@59.5,172.787 59.55,172.737 IC11.3@59.55,171.3 ; R39.2@59.517,172.787 60.952,174.222 60.952,174.852 61.832,175.732 62.632,175.732 R43.2@62.9,176
NetIC12_1: IC12.1 R48.2 | length 1.7
  Bottom Layer w0.3: R48.2@70.113,168.7 70.113,170.363 IC12.1@70.15,170.4
NetIC12_3: IC12.3 R40.2 R44.2 | length 6
  Bottom Layer w0.3: IC12.3@65.85,172.2 65.85,173.637 R40.2@65.9,173.687 65.917,173.687 67.102,174.872 67.102,175.998 68.287,177.183 R44.2@68.287,177.2
NetIC13_1: IC13.1 R57.2 | length 1.8
  Bottom Layer w0.3: R57.2@76.413,169.1 76.45,169.137 IC13.1@76.45,170.9
NetIC13_3: IC13.3 R49.2 R53.2 | length 6
  Bottom Layer w0.3: IC13.3@72.15,172.7 72.15,174.05 R49.2@72.2,174.1 72.217,174.1 72.988,174.871 72.988,175.333 74.455,176.8 R53.2@75.387,176.8
NetIC14_1: IC14.1 R58.2 | length 1.8
  Bottom Layer w0.3: R58.2@87.613,169.1 87.613,170.863 IC14.1@87.65,170.9
NetIC14_3: IC14.3 R50.2 R54.2 | length 6.5
  Bottom Layer w0.3: IC14.3@83.35,172.7 83.35,173.85 R50.2@83.1,174.1 83.117,174.1 84.202,175.185 84.202,177.098 85.287,178.183 R54.2@85.287,178.2
NetIC15_1: IC15.1 R59.2 | length 1.7
  Bottom Layer w0.3: R59.2@93.913,168.7 93.913,170.363 IC15.1@93.95,170.4
NetIC15_3: IC15.3 R51.2 R55.2 | length 5.1
  Bottom Layer w0.3: IC15.3@89.65,172.2 89.65,173.637 R51.2@89.7,173.687 89.717,173.687 90.488,174.458 90.488,175.183 91.687,176.383 R55.2@91.687,176.4
NetIC16_1: IC16.1 R60.2 | length 1.8
  Bottom Layer w0.3: R60.2@100.213,167.9 100.213,169.663 IC16.1@100.25,169.7
NetIC16_3: IC16.3 R52.2 R56.2 | length 6
  Bottom Layer w0.3: IC16.3@95.95,171.5 95.95,172.937 R52.2@96,172.987 96.017,172.987 98.53,175.5 R56.2@99.474,175.5
NetIC17_1: IC17.1 R69.2 | length 1.8
  Bottom Layer w0.3: IC17.1@106.55,169 106.613,168.937 R69.2@106.613,167.2
NetIC17_3: IC17.3 R61.2 R65.2 | length 6
  Bottom Layer w0.3: IC17.3@102.25,170.8 102.527,171.15 102.527,172.055 R61.2@102.6,172.387 102.617,172.387 103.902,173.672 103.902,174.298 105.187,175.583 R65.2@105.187,175.6
NetIC18_1: IC18.1 R70.2 | length 1.7
  Bottom Layer w0.3: R70.2@112.813,166 112.813,167.663 IC18.1@112.85,167.7
NetIC18_3: IC18.3 R62.2 R66.2 | length 5.9
  Bottom Layer w0.3: IC18.3@108.55,169.5 108.55,170.937 R62.2@108.5,170.987 108.517,170.987 110.93,173.4 R66.2@111.887,173.4
NetIC19_1: IC19.1 R71.2 | length 1.8
  Bottom Layer w0.3: R71.2@119.113,164.3 119.113,166.063 IC19.1@119.15,166.1
NetIC19_3: IC19.3 R63.2 R67.2 | length 6.6
  Bottom Layer w0.3: IC19.3@114.85,167.9 114.889,168.25 114.889,169.055 R63.2@114.9,169.387 114.917,169.387 117.68,172.15 118.355,172.15 118.687,172.483 R67.2@118.687,172.5
NetIC20_1: IC20.1 R72.2 | length 1.9
  Bottom Layer w0.3: IC20.1@126.5,164.1 126.502,163.75 126.502,162.55 R72.2@126.513,162.2
NetIC20_3: IC20.3 R64.2 R68.2 | length 7.2
  Bottom Layer w0.3: IC20.3@122.2,165.9 R64.2@122.2,167.387 122.217,167.387 123.93,169.1 R68.2@127.187,169.1
NetIC21_1: IC21.1 R79.2 | length 1.8
  Bottom Layer w0.3: IC21.1@134,161.1 134.013,161.087 R79.2@134.013,159.3
NetIC21_3: IC21.3 R73.2 R76.2 | length 6.6
  Bottom Layer w0.3: IC21.3@129.7,162.9 R73.2@129.7,164.387 129.717,164.387 132.955,167.624 132.955,167.667 R76.2@133.287,168
NetIC22_1: IC22.1 R80.2 | length 1.8
  Bottom Layer w0.3: R80.2@140.713,156.3 140.713,158.063 IC22.1@140.75,158.1
NetIC22_3: IC22.3 R74.2 R77.2 | length 6.2
  Bottom Layer w0.3: IC22.3@136.45,159.9 136.45,161.437 R74.2@136.4,161.487 136.417,161.487 138.23,163.3 R77.2@140.287,163.3
NetIC23_1: IC23.1 R81.2 | length 1.7
  Bottom Layer w0.3: R81.2@147.413,152.6 147.45,152.637 IC23.1@147.45,154.3
NetIC23_3: IC23.3 R75.2 R78.2 | length 6.5
  Bottom Layer w0.3: IC23.3@143.15,156.1 143.15,157.82 144.1,158.77 144.1,159.795 145.787,161.483 R78.2@145.787,161.5
NetIC24_4: IC24.4 R8.1 | length 3.9
  Top Layer w0.3: IC24.4@68.55,48.15 69.024,48.15 69.2,48.326 69.2,49.3 70.147,50.247 70.634,50.247 R8.1@70.9,50.513
NetIC24_5: IC24.5 R9.2 R10.1 | length 6.3
  Top Layer w0.3: R10.1@66.087,44.9 66.087,44.917 65.1,45.905 65.1,47.3 65.95,48.15 IC24.5@66.65,48.15 66.65,49.676 R9.2@66.674,49.7
NetIC25_4: IC25.4 R12.1 | length 2.7
  Top Layer w0.3: IC25.4@68.6,55.3 69.506,55.3 70.094,54.713 R12.1@71.1,54.713
NetIC25_5: IC25.5 R14.2 R15.1 | length 22.2
  Top Layer w0.3: IC25.5@66.7,55.3 66.95,55.3 67.377,55.727 70.856,55.727 71.075,55.946 73.152,55.946 73.278,56.072 75.355,56.072 77.074,54.353 81.408,54.353 82.274,53.487 R14.2@84.2,53.487 87.4,53.487 R15.1@87.5,53.387
NetIC26_4: IC26.4 R16.1 | length 2.2
  Top Layer w0.3: IC26.4@68.8,60.8 69.05,60.8 69.063,60.813 R16.1@71,60.813
NetIC26_5: IC26.5 R17.2 R18.1 | length 24.2
  Top Layer w0.3: IC26.5@66.9,60.8 67.15,60.8 68.35,62 74.8,62 75.85,60.95 75.85,58.95 76.773,58.027 83.022,58.027 84.083,59.087 R17.2@84.1,59.087 R18.1@87.3,59.087
NetQ1_1: Q1.1 R11.1 S1.A1 S1.B1 | length 12.2
  Top Layer w0.3: Q1.1@52.4,54.5 54.33,54.5 54.617,54.213 54.95,54.545 54.95,54.563 55.9,55.513 55.9,60.824 55.384,61.34 S1.B1@53.4,61.34
NetQ2_1: Q2.1 R13.2 | length 2
  Top Layer w0.3: R13.2@50.017,49.913 R13.2@50,49.913 50.013,49.9 Q2.1@52,49.9
P4: R1.1 R2.2 U1.16
PA8: IC1.2 U3.18
PA9: IC1.3 U3.19
PA10: IC2.2 U3.21
PA11: IC2.3 U3.22
PA15: CON8.1 U3.26
PB4: IC3.2 U3.28
PB5: IC3.3 U3.29
PWM-SERVO: CON9.1 U3.27
RESET: C1.2 CON1.1 R3.2 U1.6
RESET1: C7.2 CON3.1 R7.2 U3.6
RESET_CONTROL: U1.18 U2.33
SPI_MISO: U1.28 U2.24
SPI_MOSI: U1.29 U2.18
SPI_NSS: U1.26 U2.21
SPI_SCK: U1.27 U2.19
START: CON10.2 U1.17
SWCLK: CON1.4 CON3.4 U1.25 U3.25
SWDIO: CON1.2 CON3.2 U1.24 U3.24
"UART RX": U1.31 U3.30
"UART TX": U1.30 U3.31
pads on no net: AC1.1 AC1.4 AC1.9 AC1.10 AC1.11 ANT1.1 ANT1.2 ANT1.3 ANT1.6 CON1.A CON1.B CON2.A CON2.B CON3.A CON3.B CON4.1 CON4.A CON4.B CON5.2 CON5.A CON5.B CON6.7 CON6.8 CON6.A CON6.B CON7.7 CON7.8 CON7.A CON7.B CON8.A CON8.B CON9.A CON9.B CON10.1 IC24.6 IC25.6 IC26.6 U1.1 U1.32 U2.1 U2.8 U2.9 U2.10 U2.11 U2.12 U2.13 U2.14 U2.15 U2.22 U2.23 U2.26 U2.27 U2.28 U2.29 U2.30 U2.31 U2.34 U2.36 U2.37 U2.38 U2.41 U3.20

## Silkscreen, mask and mechanical layers (free items; w line width, h text height)
Mechanical 1:
  lines w0.254: 10.138,145.665 10.138,162.738 cw(c80,30) 149.077,163.148 149.077,145.945 ; 10.151,145.643 cw(c80,30) 29.998,155.506 29.998,69.002 ; 30,69 21,60 20,59 20,11 21,10 139,10 140,11 140,59 139,60 130,69 ; 130,69 130,155.301 cw(c80,30) 149.05,145.899
Board:
  pour cut-out: 44.6,64.4 40,69 39.99,69.01 39.99,159.032 cw(c80,30) 120.01,159.032 120.01,69 120,69 115.4,64.4
  lines w0.254: 39.99,69.01 39.99,159.032 cw(c80,30) 120.01,159.032 120.01,69 ; 40,69 44.6,64.4 115.4,64.4 120,69

## Text inside footprints (layer, text, board x,y; h text height)
U1: Mechanical 13 "*" at 113.086,53.235 h1.27 r180
U2: Mechanical 13 "*" at 109.988,46.665 h1.27
U3: Mechanical 13 "*" at 30.387,48.835 h1.27 r180